# Altium PCB Final Project Workshop-ATMEGA328P.PcbDoc
Units mm, origin at the board's own origin, x right, y up, seen from the top; angles counter-clockwise.
Board outline 152.4 x 101.6 mm, 2 copper layers (Top Layer, Bottom Layer); 11 components, 38 nets, 82 pads, 0 vias.
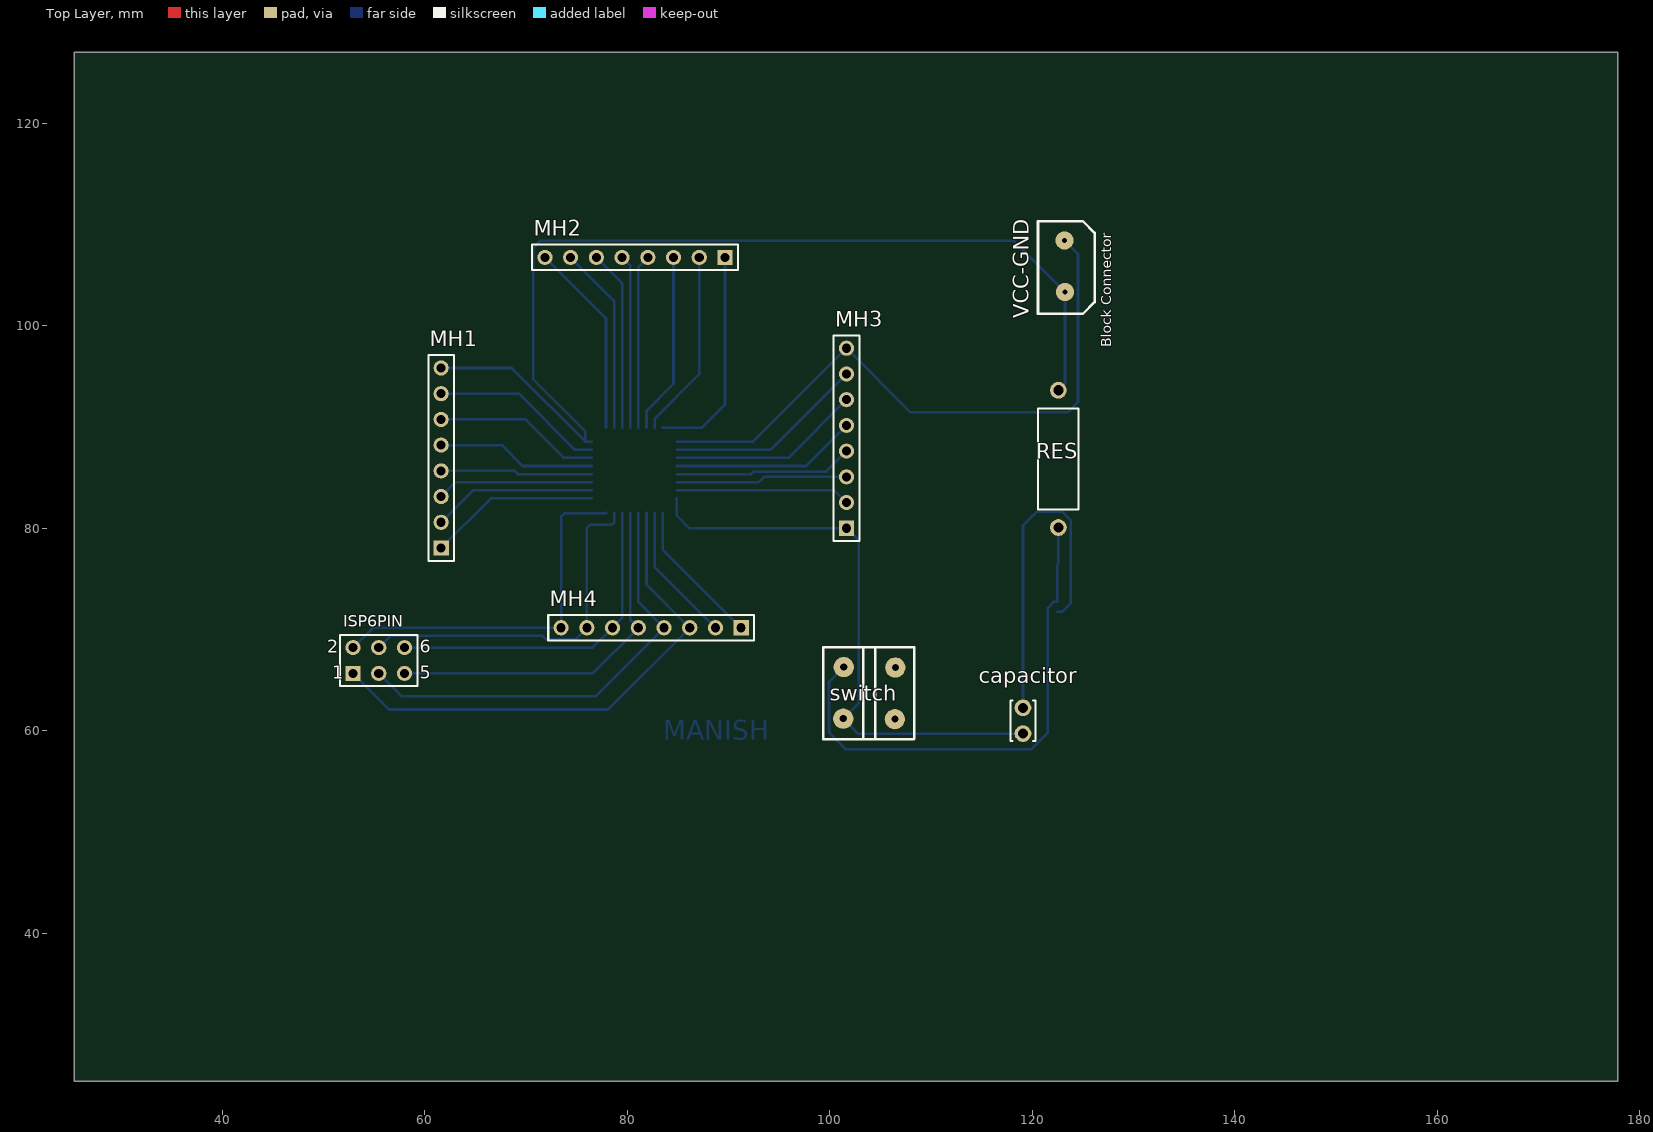
[diagram p0: Top Layer view]
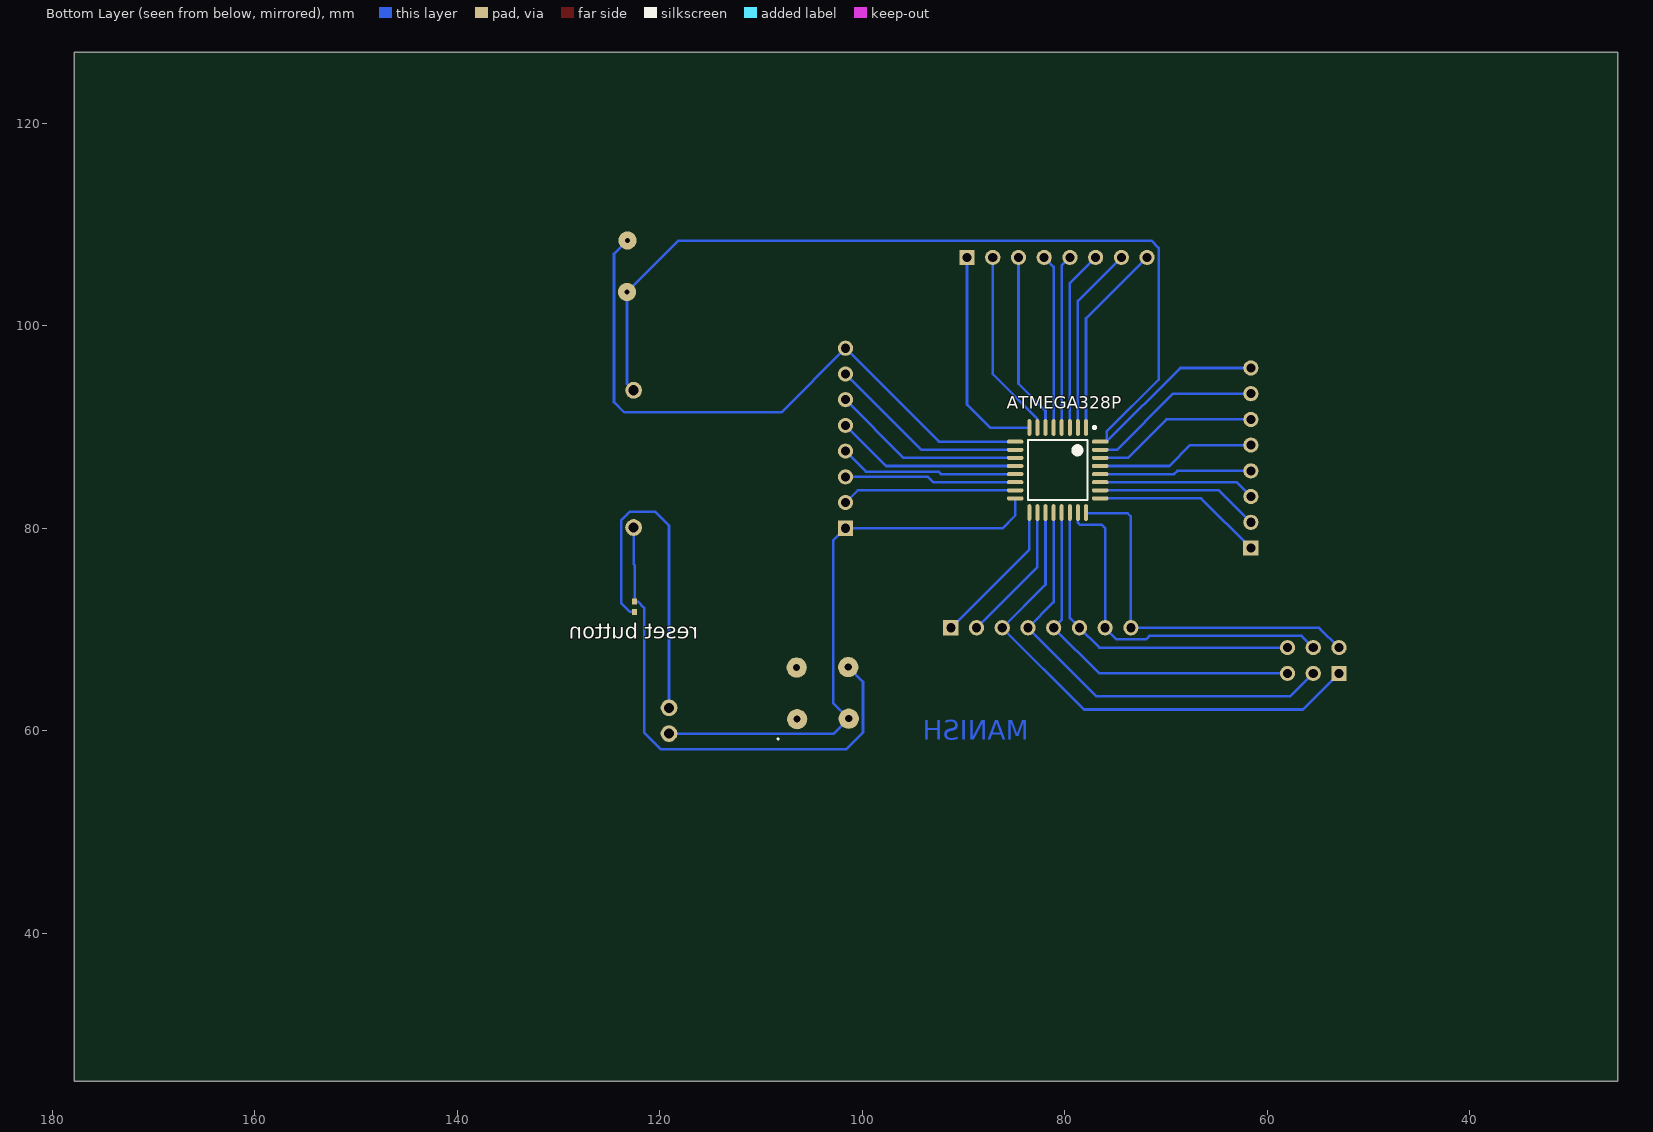
[diagram p1: Bottom Layer view, seen from below]

## Layer stack, top to bottom
Top Layer: signal copper 0.0356
Dielectric: dielectric 0.32, FR-4, Dk 4.8
Bottom Layer: signal copper 0.0356

## Board outline
25.4,25.4 177.8,25.4 177.8,127 25.4,127

## Design rules (kind name [scope] priority, off if disabled: settings)
Clearance [All] p1: gap=0.254
PolygonConnect [All] p1: connectstyle=Relief reliefconductorwidth=0.254 reliefentries=4 polygonreliefangle="90 Angle"
RoutingVias [All] p1: holewidth=0.711 width=1.27 viastyle="Through Hole" minholewidth=0.711 minwidth=1.27 maxholewidth=0.711 maxwidth=1.27
SilkscreenOverComponentPads [All] p1: minsilkscreentomaskgap=0.254
SolderMaskExpansion [All] p1: expansion=0.102
Width [All] p1: maxlimit=0.254 minlimit=0.254 preferedwidth=0.254
27 further rules are at their usual default settings.

## Components (designator, comment, footprint, x,y, rotation, side; value= is the part's Value field where it differs from the comment)
ATMEGA328P "Comment" TQFP80P900X900-32N 80.7,85.75 r270 bottom
capacitor "Comment" CAPR2.54-4x2.5 119.075,61 r90 top
ISP6PIN "Comment" HDR2X3 52.925,65.675 r0 top
MH1 "Comment" HDR1X8 61.625,78.05 r90 top
MH2 "Comment" HDR1X8 89.65,106.75 r180 top
MH3 "Comment" HDR1X8 101.65,80 r90 top
MH4 "Comment" HDR1X8 91.25,70.175 r180 top
RES "Comment" RES13.55-10X4 122.575,86.85 r90 top
"reset button" "Comment" CAPC1005L 122.475,72.25 r270 bottom
switch "Comment" "Push Button" 103.9,63.725 r90 top
VCC-GND "Comment" "PCB Block Connector" 123.2,105.875 r90 top

## Footprints (in the part's own frame and the unit in brackets; to place one, negate y for a bottom-side part, rotate by r counter-clockwise, add the part's x,y. Pads: shape width x height; smd on the part's side, far side on the other; paste and mask are expansions set on the pad)
CAPC1005L [mm] "Chip Capacitor, Body 1.0x0.5mm, IPC High Density"
  rect 0.6x0.5 smd: 1(-0.5,0) 2(0.5,0)
  body extent -0.55,-0.3 0.55,0.3, height 0.6
CAPR2.54-4x2.5 [mm] "Capacitor, Ceramic, Thru-Hole, Dipped Radial; Body 4 x 2.5 mm (WxT) Pin Spacing 2.54 mm (typ)"
  round 1.65 hole 1: 1(-1.27,0) 2(1.27,0)
  silkscreen extent -2,-1.25 2,1.25
HDR1X8 [mm]
  rect 1.5x1.5 hole 0.9: 1(0,0)
  round 1.5 hole 0.9: 2(2.54,0) 3(5.08,0) 4(7.62,0) 5(10.16,0) 6(12.7,0) 7(15.24,0) 8(17.78,0)
  silkscreen extent -1.27,-1.27 19.05,1.27
HDR2X3 [mm]
  rect 1.5x1.5 hole 0.9: 1(0,0)
  round 1.5 hole 0.9: 2(0,2.54) 3(2.54,0) 4(2.54,2.54) 5(5.08,0) 6(5.08,2.54)
  silkscreen extent -1.27,-1.27 6.35,3.81
"PCB Block Connector" [mm]
  round 1.8 hole 0.5: 1(-2.547,-0.023) 2(2.547,0.023)
  silkscreen extent -4.7,-2.94 4.45,2.64
"Push Button" [mm]
  round 2 hole 0.7: 1(-2.524,2.57) 2(2.57,2.524) 3(-2.57,-2.524) 4(2.524,-2.57)
  silkscreen extent -4.55,-4.42 4.52,4.55
RES13.55-10X4 [mm] "Resistor, Axial; Body 10 x 4 mm (LxDia. max), Lead Dia. 0.65 mm (max)"
  round 1.65 hole 1: 1(-6.775,0) 2(6.775,0)
  silkscreen extent -5,-2 5,2
TQFP80P900X900-32N [mm] "Thin QFP, 32-Leads, Body 7x7mm, Pitch 0.8mm, IPC Medium Density"
  oval 1.65x0.4 smd: 1(-4.2,2.8) 2(-4.2,2) 3(-4.2,1.2) 4(-4.2,0.4) 5(-4.2,-0.4) 6(-4.2,-1.2) 7(-4.2,-2) 8(-4.2,-2.8) 17(4.2,-2.8) 18(4.2,-2) 19(4.2,-1.2) 20(4.2,-0.4) 21(4.2,0.4) 22(4.2,1.2) 23(4.2,2) 24(4.2,2.8)
  oval 0.4x1.65 smd: 9(-2.8,-4.2) 10(-2,-4.2) 11(-1.2,-4.2) 12(-0.4,-4.2) 13(0.4,-4.2) 14(1.2,-4.2) 15(2,-4.2) 16(2.8,-4.2) 25(2.8,4.2) 26(2,4.2) 27(1.2,4.2) 28(0.4,4.2) 29(-0.4,4.2) 30(-1.2,4.2) 31(-2,4.2) 32(-2.8,4.2)
  silkscreen extent -4.32,-2.95 2.95,3.75, body extent -3.5,-3.5 3.5,3.5, height 1.2

## Nets (pads, with @x,y where several pads share a name; then routed paths per layer and width w, separated by ;. In a path a pad name is that pad's centre, name@x,y a point inside that pad or via, vN(x,y) a via of type N, cw(c..) or ccw(c..) an arc to the next point about the centre after c; other vN are vias at no path point)
a1: ATMEGA328P.1 MH2.8 | length 19.3
  Bottom Layer w0.254: MH2.8 77.9,100.72 ATMEGA328P.1
a2: ATMEGA328P.2 MH2.7 | length 18.6
  Bottom Layer w0.254: MH2.7 78.7,102.46 ATMEGA328P.2
a3: ATMEGA328P.3 MH2.6 | length 17.9
  Bottom Layer w0.254: MH2.6 79.5,104.2 ATMEGA328P.3
a4: ATMEGA328P.4 MH2.5 | length 17.1
  Bottom Layer w0.254: MH2.5 80.3,105.94 ATMEGA328P.4
a5: ATMEGA328P.5 MH2.4 | length 17.2
  Bottom Layer w0.254: ATMEGA328P.5 81.1,105.82 MH2.4
a6: ATMEGA328P.6 MH2.3 | length 17.9
  Bottom Layer w0.254: ATMEGA328P.6 81.9,91.603 84.57,94.273 MH2.3
a7: ATMEGA328P.7 MH2.2 | length 18.6
  Bottom Layer w0.254: ATMEGA328P.7 82.7,90.803 87.11,95.213 MH2.2
a8: ATMEGA328P.8 MH2.1 | length 21.6
  Bottom Layer w0.254: ATMEGA328P.8 83.5,89.941 87.376,89.941 89.65,92.215 MH2.1
a9: 
a10: ATMEGA328P.10 MH3.7 | length 19.9
  Bottom Layer w0.254: ATMEGA328P.10 94.16,87.75 MH3.7
a11: ATMEGA328P.11 MH3.6 | length 19.1
  Bottom Layer w0.254: ATMEGA328P.11 95.9,86.95 MH3.6
a12: ATMEGA328P.12 MH3.5 | length 18.4
  Bottom Layer w0.254: ATMEGA328P.12 97.64,86.15 MH3.5
a13: ATMEGA328P.13 MH3.4 | length 17.7
  Bottom Layer w0.254: ATMEGA328P.13 92.233,85.35 92.481,85.598 99.628,85.598 MH3.4
a14: ATMEGA328P.14 MH3.3 | length 17
  Bottom Layer w0.254: ATMEGA328P.14 92.989,84.55 93.519,85.08 MH3.3
a15: ATMEGA328P.15 MH3.2 | length 17.3
  Bottom Layer w0.254: ATMEGA328P.15 100.44,83.75 MH3.2
a16: ATMEGA328P.16 capacitor.1 MH3.1 switch.1 | length 57.3
  Bottom Layer w0.254: ATMEGA328P.16 84.887,82.95 84.887,81.28 86.167,80 MH3.1 102.87,78.78 102.87,62.741 switch.1 102.801,59.73 capacitor.1
a17: ATMEGA328P.17 MH4.1 | length 14.6
  Bottom Layer w0.254: ATMEGA328P.17 83.5,77.925 MH4.1
a18: ATMEGA328P.18 MH4.2 | length 13.9
  Bottom Layer w0.254: ATMEGA328P.18 82.7,76.185 MH4.2
a19: ATMEGA328P.19 ISP6PIN.1 MH4.3 | length 51.2
  Bottom Layer w0.254: ISP6PIN.1 56.497,62.103 78.098,62.103 MH4.3 81.9,74.445 ATMEGA328P.19
a20: ATMEGA328P.20 ISP6PIN.3 MH4.4 | length 44.3
  Bottom Layer w0.254: ISP6PIN.3 57.742,63.398 76.853,63.398 MH4.4 81.1,72.705 ATMEGA328P.20
a21: ATMEGA328P.21 ISP6PIN.5 MH4.5 | length 36.7
  Bottom Layer w0.254: ISP6PIN.5 76.59,65.675 MH4.5 80.3,70.965 ATMEGA328P.21
a22: ATMEGA328P.22 ISP6PIN.6 MH4.6 | length 33.1
  Bottom Layer w0.254: ISP6PIN.6 76.59,68.215 MH4.6 79.5,71.125 ATMEGA328P.22
a23: ATMEGA328P.23 ISP6PIN.4 MH4.7 | length 35.4
  Bottom Layer w0.254: ISP6PIN.4 56.617,69.367 71.653,69.367 71.984,69.037 74.872,69.037 MH4.7 76.01,80.01 76.34,80.34 78.486,80.34 78.7,80.554 ATMEGA328P.23
a24: ATMEGA328P.24 ISP6PIN.2 MH4.8 | length 37
  Bottom Layer w0.254: ISP6PIN.2 54.885,70.175 MH4.8 73.47,81.166 73.787,81.483 77.9,81.483 ATMEGA328P.24
a25: ATMEGA328P.25 MH1.1 | length 16.9
  Bottom Layer w0.254: MH1.1 66.525,82.95 ATMEGA328P.25
a26: ATMEGA328P.26 MH1.2 | length 16.2
  Bottom Layer w0.254: MH1.2 64.785,83.75 ATMEGA328P.26
a27: ATMEGA328P.27 MH1.3 | length 15.5
  Bottom Layer w0.254: MH1.3 63.045,84.55 ATMEGA328P.27
a28: ATMEGA328P.28 MH1.4 | length 15
  Bottom Layer w0.254: MH1.4 68.885,85.67 69.205,85.35 ATMEGA328P.28
a29: ATMEGA328P.29 MH1.5 | length 15.7
  Bottom Layer w0.254: MH1.5 67.619,88.21 69.679,86.15 ATMEGA328P.29
a30: ATMEGA328P.30 MH1.6 | length 16.4
  Bottom Layer w0.254: MH1.6 69.962,90.75 73.762,86.95 ATMEGA328P.30
a31: ATMEGA328P.31 MH1.7 | length 17.2
  Bottom Layer w0.254: MH1.7 69.314,93.29 74.854,87.75 ATMEGA328P.31
a32: 
c1: "reset button.2" capacitor.2 | length 33.5
  Bottom Layer w0.254: capacitor.2 119.075,80.264 120.447,81.636 122.936,81.636 123.8,80.772 123.8,72.614 122.936,71.75 122.475,71.75
c2: 
gnd: ATMEGA328P.9 MH3.8 VCC-GND.2 | length 63
  Bottom Layer w0.254: ATMEGA328P.9 92.42,88.55 MH3.8 107.99,91.44 123.495,91.44 124.511,92.456 124.511,107.088 VCC-GND.2
r1: "reset button.1" RES.1 switch.2 | length 50.9
  Bottom Layer w0.254: switch.2 99.924,64.843 99.924,59.842 101.6,58.166 119.888,58.166 121.539,59.817 121.539,72.136 122.153,72.75 122.475,72.75 122.475,76.352 122.575,76.452 RES.1
r2: 
vcc: ATMEGA328P.32 MH1.8 RES.2 VCC-GND.1 | length 104
  Bottom Layer w0.254: MH1.8 68.59,95.83 ATMEGA328P.32@75.87,88.55 ; ATMEGA328P.32 ATMEGA328P.32@75.87,88.55 ; RES.2 123.223,94.273 VCC-GND.1 118.144,108.407 71.45,108.407 70.739,107.696 70.739,94.666 75.87,89.535 ATMEGA328P.32@75.87,88.55
pads on no net: switch.3 switch.4

## Other copper
Bottom Layer:
  text "MANISH" at 83.55,59.125 h1.92

## Text inside footprints (layer, text, board x,y; h text height)
ISP6PIN: Top Overlay "1" at 50.893,65.167 h1.27; Top Overlay "2" at 50.385,67.707 h1.27; Top Overlay "5" at 59.529,65.167 h1.27; Top Overlay "6" at 59.529,67.707 h1.27
VCC-GND: Top Overlay "Block Connector" at 127.772,97.874 h1.02 r90